# Altium PCB Tone Stack.PcbDoc
Units mil, origin at the board's own origin, x right, y up, seen from the top; angles counter-clockwise.
Board outline 1300 x 800 mil, 2 copper layers (Top Layer, Bottom Layer); 24 components, 19 nets, 70 pads, 12 vias.
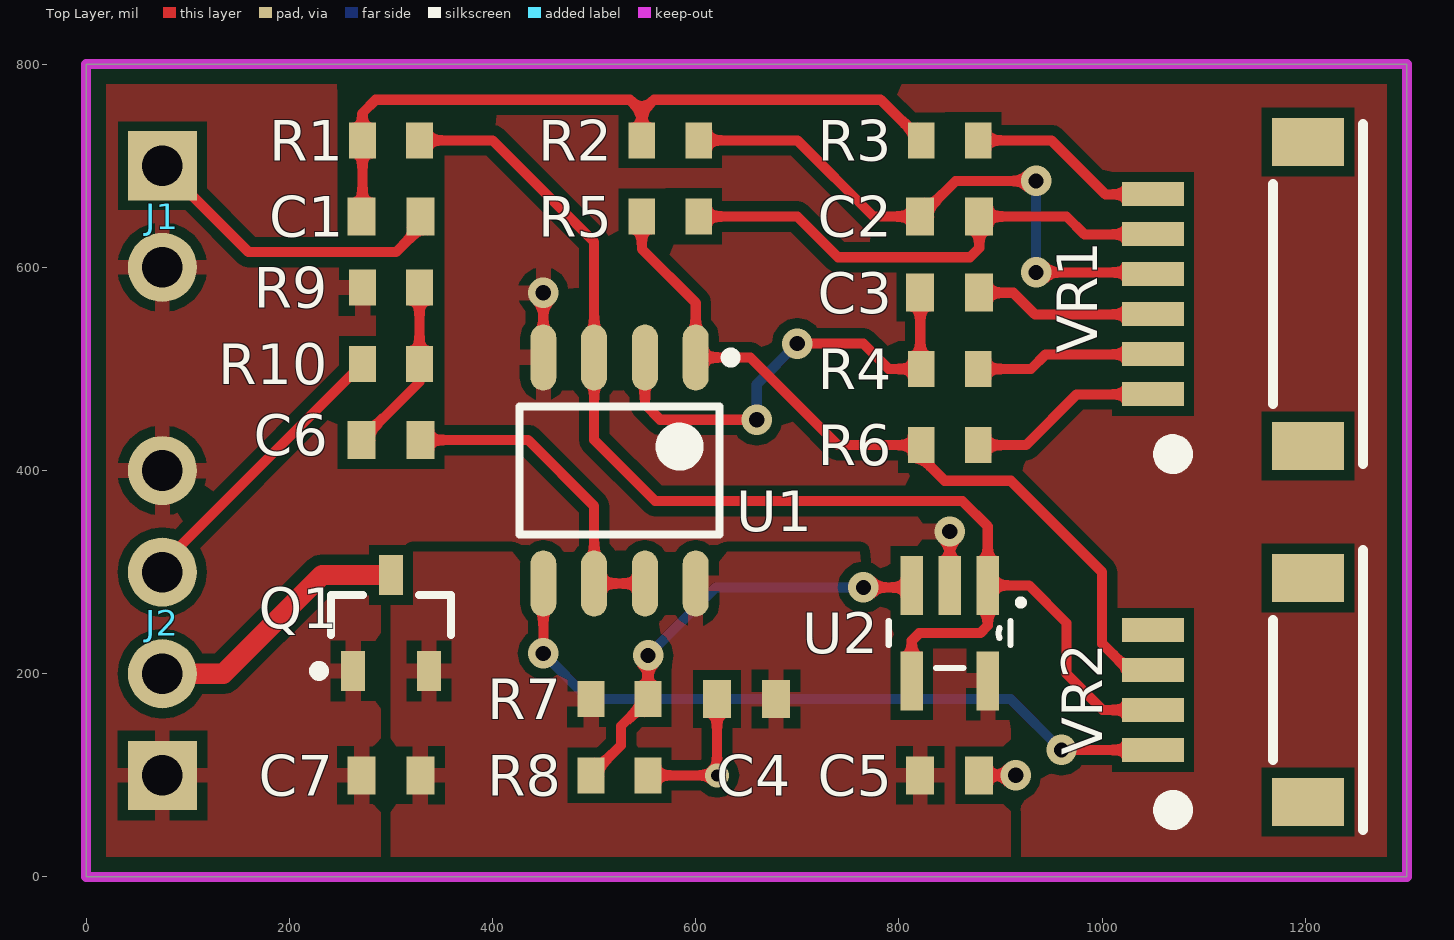
[diagram p0: Top Layer view]
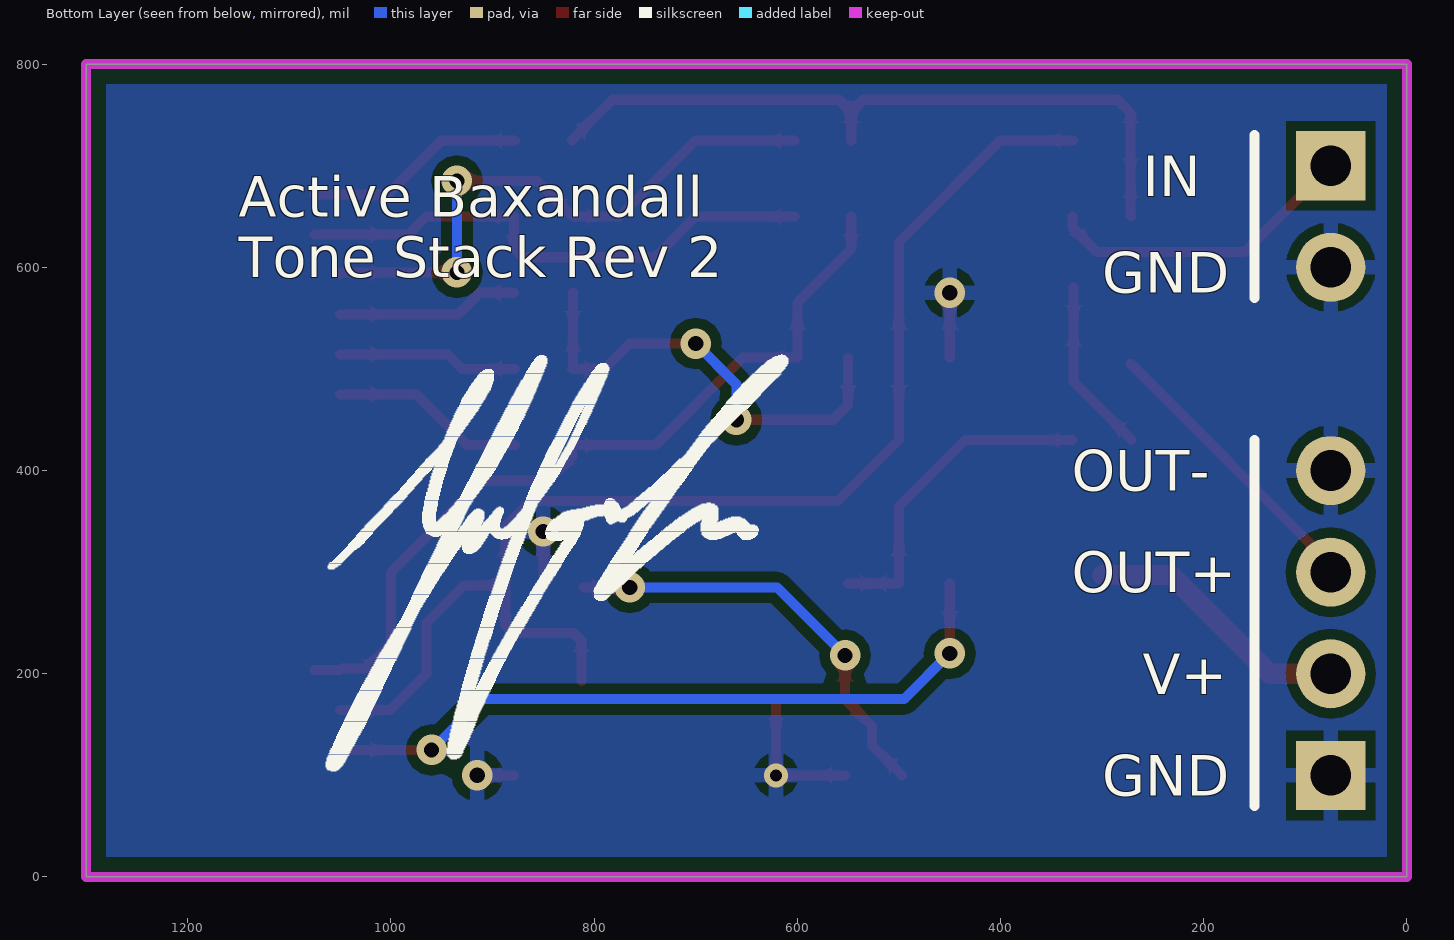
[diagram p1: Bottom Layer view, seen from below]
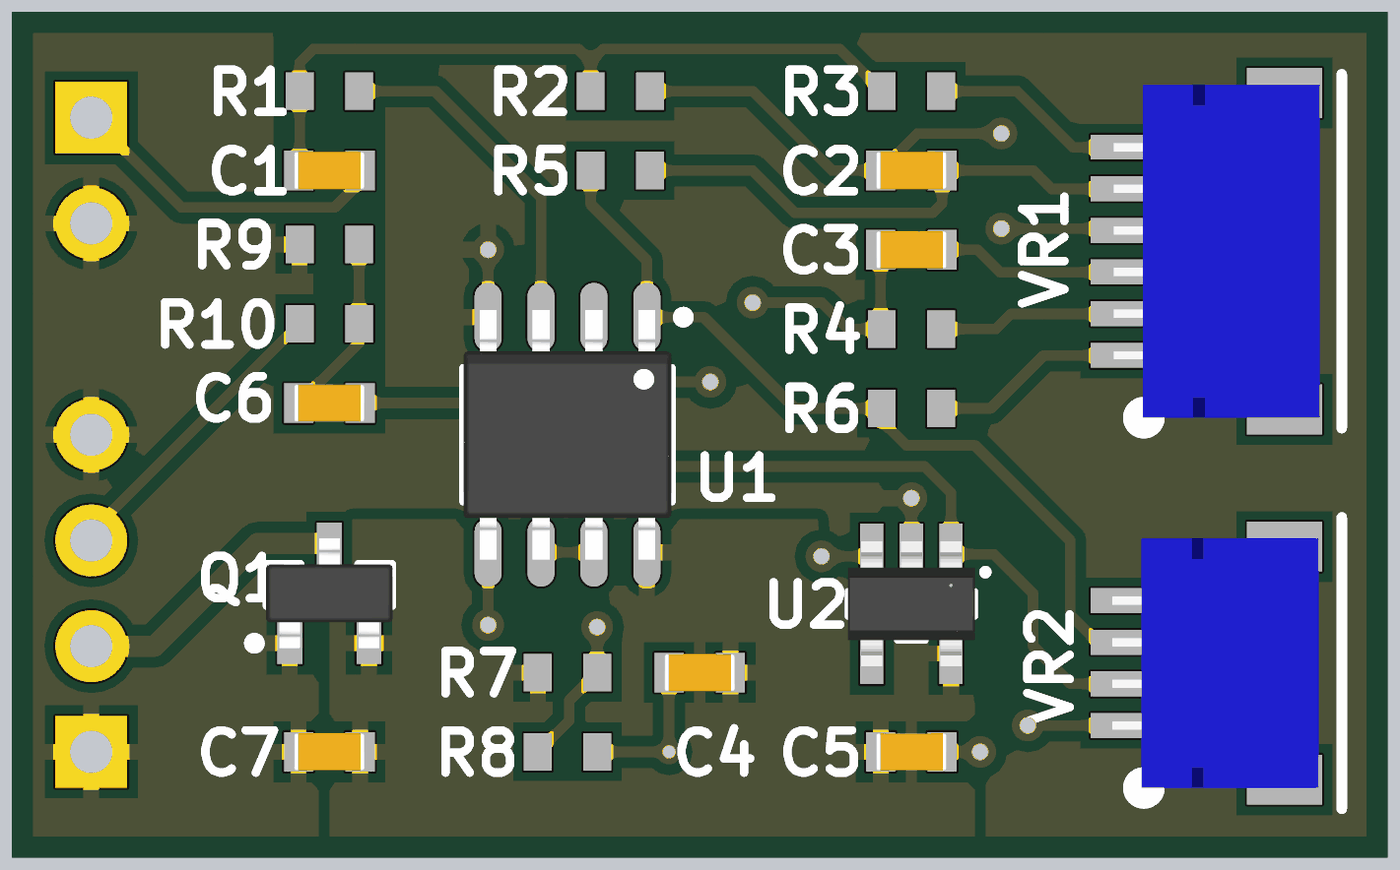
[diagram p2: 3D render of the assembled board from above, using the file's embedded part models]

## Layer stack, top to bottom
Top Solder: solder mask 0.4, Solder Resist, Dk 3.5
Top Layer: signal copper 1.4
Dielectric 1: dielectric 12.6, FR-4, Dk 4.8
Bottom Layer: signal copper 1.4
Bottom Solder: solder mask 0.4, Solder Resist, Dk 3.5

## Board outline
0,0 1300,0 1300,800 0,800

## Design rules (kind name [scope] priority, off if disabled: settings)
Clearance [All] p1: gap=10
MinimumSolderMaskSliver [All] p1: minsoldermaskwidth=5
PolygonConnect [All] p1: connectstyle=Relief reliefconductorwidth=15 reliefentries=4 polygonreliefangle="90 Angle" airgapwidth=10
RoutingVias [All] p1: holewidth=15 width=30 viastyle="Through Hole" minholewidth=13 minwidth=28 maxholewidth=20 maxwidth=40
SolderMaskExpansion [All] p1: expansion=2
Width [All] p1: maxlimit=50 minlimit=10 preferedwidth=12
29 further rules are at their usual default settings.

## Components (designator, comment, footprint, x,y, rotation, side; value= is the part's Value field where it differs from the comment)
C1 "1uF" CAPC1608X09N 300,650 r180 top
C2 "4700pF" CAPC1608X09N 850,650 r0 top
C3 "2200pF" CAPC1608X09N 850,575 r180 top
C4 "0.1uF" CAPC1608X09N 650,175 r0 top
C5 "0.1uF" CAPC1608X09N 850,100 r180 top
C6 "1uF" CAPC1608X09N 300,430 r180 top
C7 "1uF" CAPC1608X09N 300,100 r0 top
J1 "Tone Stack Connectors" "Conn 2 Pin 2.54mm Pitch" 75,700 r270 top
J2 "Tone Stack Output Conn" "Conn 4 Pin 2.54mm Pitch" 75,100 r90 top
Q1 "SI2399DS-T1-GE3" SOT95P237X112-3N 300,250 r90 top
R1 "47K" RESC1608X06N 300,725 r180 top
R2 "20K" RESC1608X06N 575,725 r0 top
R3 "4.99K" RESC1608X06N 850,725 r0 top
R4 "20K" RESC1608X06N 850,500 r0 top
R5 "20K" RESC1608X06N 575,650 r180 top
R6 "4.99K" RESC1608X06N 850,425 r180 top
R7 "20K" RESC1608X06N 525,175 r180 top
R8 "20K" RESC1608X06N 525,100 r180 top
R9 "47K" RESC1608X06N 300,580 r0 top
R10 "10K" RESC1608X06N 300,505 r180 top
U1 "OPA2170AIDR" SOIC127P600X175-8M 525,400 r270 top
U2 "OPA191" SOT23-5 850,240 r270 top
VR1 "100K" SM06B 1050,475.2 r90 top
VR2 "25K" SM04B 1050,124.92 r90 top

## Footprints (in the part's own frame and the unit in brackets; to place one, negate y for a bottom-side part, rotate by r counter-clockwise, add the part's x,y. Pads: shape width x height; smd on the part's side, far side on the other; paste and mask are expansions set on the pad)
CAPC1608X09N [mm] "Chip Capacitor, 2-Leads, Body 1.60x0.80mm, IPC Medium Density"
  rect 0.7x0.95 smd: 1(-0.738,0) 2(0.738,0)
  body extent -0.85,-0.45 0.85,0.45, height 0.8
"Conn 2 Pin 2.54mm Pitch" [mil] "Connector, Through-hole, 2.54mm Pitch"
  rect 68x68 hole 40: 1(0,0)
  round 68 hole 40: 2(100,0)
"Conn 4 Pin 2.54mm Pitch" [mil] "Connector, Through-hole, 2.54mm Pitch"
  rect 68x68 hole 40: 1(0,0)
  round 68 hole 40: 2(100,0) 3(200,0) 4(300,0)
RESC1608X06N [mm] "Chip Resistor, 2-Leads, Body 1.60x0.80mm, IPC Medium Density"
  rect 0.67x0.9 smd: 1(-0.713,0) 2(0.713,0)
  body extent -0.85,-0.45 0.85,0.45, height 0.55
SM04B [mm] "JST 4 POS 1MM"
  rect 0.6x1.55 smd: 1(0,0) 2(1,0) 3(2,0) ""(3,0)
  rect 1.2x1.8 smd: ""(-1.3,-3.875) ""(4.3,-3.875)
  silkscreen extent -2,-5.25 5,-0.25, body extent -1.5,-4.69 4.5,0.26, height 2.96
SM06B [mm] "JST 6 POS 1MM"
  rect 0.6x1.55 smd: 1(0,0) 2(1,0) 3(2,0) 4(3,0) 5(4,0) 6(5,0)
  rect 1.2x1.8 smd: ""(-1.3,-3.875) ""(6.3,-3.875)
  silkscreen extent -1.75,-5.25 6.75,-0.25, body extent -1.5,-4.73 6.5,0.23, height 2.96
SOIC127P600X175-8M [mm] "SOIC, 8-Leads, Body 4.90x3.90mm, Pitch 1.27mm, IPC Low Density"
  oval 1.65x0.65 smd: 1(-2.825,1.905) 2(-2.825,0.635) 3(-2.825,-0.635) 4(-2.825,-1.905) 5(2.825,-1.905) 6(2.825,-0.635) 7(2.825,0.635) 8(2.825,1.905)
  silkscreen extent -2.95,-2.5 1.6,2.91, body extent -3,-2.5 3,2.5, height 1.75
SOT23-5 [mil]
  rect 58x22 smd: 1(-47,37.4) 2(-47,0) 3(-47,-37.4) 4(47,-37.4) 5(47,37.4)
  silkscreen extent -31,-60 34,71, body extent -59,-60 59,60, height 57
SOT95P237X112-3N [mm] "SOT23, 3-Leads, Body 2.92x2.37mm, Pitch 0.95mm, IPC Medium Density"
  rect 1x0.6 smd: 1(-1.2,0.95) 2(-1.2,-0.95) 3(1.2,0)
  silkscreen extent -1.32,-1.5 0.7,1.92, body extent -1.32,-1.52 1.32,1.52, height 1.12

## Part data
C1 C6 C7: library part "CAP CER 1uF 0603"
C2: library part "CAP CER 4700pF 0603"
C3: library part "CAP CER 2200pF 0603"
C4 C5: library part "CAP CER 0.1uF 0603"
Q1: library part MOSFET_P_CH_20V_6A_SOT23-3, "Reverse Voltage MOSFET"
R1 R9: library part "RES 47K 0603", "RES 47K 0603"
R2 R4 R5 R7 R8: library part "RES 20K 0603"
R3 R6: library part "RES 4.99K 0603"
R10: library part "RES 10K 0603", "RES 10K 0603"
U1 U2: "Low Power CMOS Amp"
VR1: library part "Pot - Dual Gang"
VR2: library part "Pot - Single Gang"

## Via types
v1: diameter 30, hole 15, Top Layer to Bottom Layer, tented both sides, 11 vias
v2: diameter 23.62, hole 11.81, Top Layer to Bottom Layer, tented both sides, 1 vias

## Nets (pads, with @x,y where several pads share a name; then routed paths per layer and width w, separated by ;. In a path a pad name is that pad's centre, name@x,y a point inside that pad or via, vN(x,y) a via of type N, cw(c..) or ccw(c..) an arc to the next point about the centre after c; other vN are vias at no path point)
9V_IN: J2.2 Q1.3 | length 265.3
  Top Layer w20: J2.2 135,200 232.24,297.24 Q1.3
GND: C4.1 C5.1 C7.1 J1.2 J2.1 J2.4 Q1.1 R8.1 R9.1 U1.4 U2.2 | length 295.7
  Top Layer w10: U1.4 v1(450,575) ; R8.1 v2(620.96,100) C4.1 ; U2.2 v1(850,340) ; C5.1 v1(915,100)
NetC1_1: C1.1 J1.1 | length 310.2
  Top Layer w10: J1.1 160,615 305,615 329.04,639.04 C1.1
NetC1_2: C1.2 R1.2 R2.1 R3.1 | length 712.3
  Top Layer w10: C1.2 271.95,650.98 R1.2 271.95,751.95 285,765 535,765 546.95,753.05 ; R2.1 546.95,753.05 ; R3.1 781.95,765 558.9,765 546.95,753.05
NetC2_1: C2.1 R2.2 VR1.4 | length 583.3
  Top Layer w10: R2.2 700,725 775,650 C2.1 855.96,685 v1(935,685) ; v1(935,595) 1048.11,595 VR1.4@1050,593.11
  Bottom Layer w10: v1(935,595) v1(935,685)
NetC2_2: C2.2 R5.1 VR1.5 | length 530.5
  Top Layer w10: R5.1 700,650 740,610 870,610 879.04,619.04 C2.2 965,650 982.52,632.48 VR1.5@1075,632.48
NetC3_1: C3.1 VR1.3 | length 179.8
  Top Layer w10: C3.1 912.57,575 933.83,553.74 VR1.3@1050,553.74
NetC3_2: C3.2 R4.1 U1.2 | length 461.7
  Top Layer w10: U1.2 550,465 565,450 v1(660,450) ; v1(700,525) 765,525 790,500 R4.1 820.96,500.98 C3.2
  Bottom Layer w10: v1(660,450) 660,485 v1(700,525)
NetC6_1: C6.1 U1.6 U1.7 | length 324.1
  Top Layer w10: C6.1 435,430 500,365 U1.6 U1.7
NetC6_2: C6.2 R9.2 R10.1 | length 173.6
  Top Layer w10: C6.2 328.05,487.09 R10.1 R9.2
NetR3_2: R3.2 VR1.6 | length 219
  Top Layer w10: R3.2 950,725 1003.15,671.85 VR1.6@1075,671.85
NetR4_2: R4.2 VR1.2 | length 177.9
  Top Layer w10: R4.2 930,500 944.37,514.37 VR1.2@1050,514.37
NetR5_2: R5.2 R6.2 U1.1 VR2.3 | length 811.4
  Top Layer w10: R5.2 546.95,618.05 600,565 U1.1 653.78,511.22 740,425 R6.2 821.95,413.05 845,390 910,390 1000,300 1000,229.5 1024.5,205 1048.74,205 VR2.3 VR2.3@1075,203.74
NetR6_1: R6.1 VR1.1 | length 192.7
  Top Layer w10: R6.1 925,425 975,475 VR1.1@1050,475
NetR7_1: R7.1 R8.2 U2.3 | length 426.6
  Top Layer w10: R8.2 526.53,129.58 526.53,148.47 R7.1 v1(553.05,218.05) ; v1(765,285) U2.3@810.6,285
  Bottom Layer w10: v1(553.05,218.05) 620,285 v1(765,285)
NetU1_5: U1.5 VR2.1 | length 708.1
  Top Layer w10: v1(450,220) U1.5 ; v1(960,125) VR2.1@1050,125
  Bottom Layer w10: v1(450,220) 495,175 910,175 v1(960,125)
OUT+: J2.3 R10.2 | length 286.6
  Top Layer w10: J2.3 75,308.05 R10.2
V+: C4.2 C5.2 C7.2 Q1.2 R7.2 U1.8 U2.5
VREF: R1.1 U1.3 U2.1 U2.4 VR2.2 | length 1291.8
  Top Layer w10: R1.1 400,725 500,625 U1.3 500,430 560,370 862.43,370 887.4,345.02 U2.1 ; U2.4 812.6,232.6 820,240 880,240 887.4,247.4 U2.1 ; VR2.2@1050,164.37 1000.63,164.37 965,200 965,250 928,287 U2.1
pads on no net: VR1. VR2.

## Polygon pours and split planes (outlines as drawn)
V+ on Top Layer "TOP_V+" (solid, pour order 2): 300,320 910,320 910,20 300,20
GND on Top Layer "TOP_GND" (solid, pour order 4): 20,20 20,780 1280,780 1280,20
GND on Bottom Layer "BOTTOM_GND" (solid, pour order 6): 20,780 1280,780 1280,20 20,20

## Keep-outs
Keep-Out Layer:
  the board outline again, w10

## Other copper
Top Layer:
  pour cut-out: 247.18,770 247.18,630.29 285,625.62 285,401.3 352.82,401.3 352.82,777.82 355,780

## Silkscreen, mask and mechanical layers (free items; w line width, h text height)
Bottom Overlay:
  drawing of 1696 lines, arcs and shapes, not listed
  text "IN" at 260,670 h40
  text "Active Baxandall / Tone Stack Rev 2" at 1150,590 h40
  text "GND" at 300,575 h40
  text "OUT-" at 330,380 h40
  text "OUT+" at 330,280 h40
  text "V+" at 260,180 h40
  text "GND" at 300,80 h40